# Altium PCB PCB.PcbDoc
Units mm, origin at the board's own origin, x right, y up, seen from the top; angles counter-clockwise.
Board outline 65.02 x 20.73 mm, 2 copper layers (Top Layer, Bottom Layer); 16 components, 12 nets, 32 pads, 0 vias.
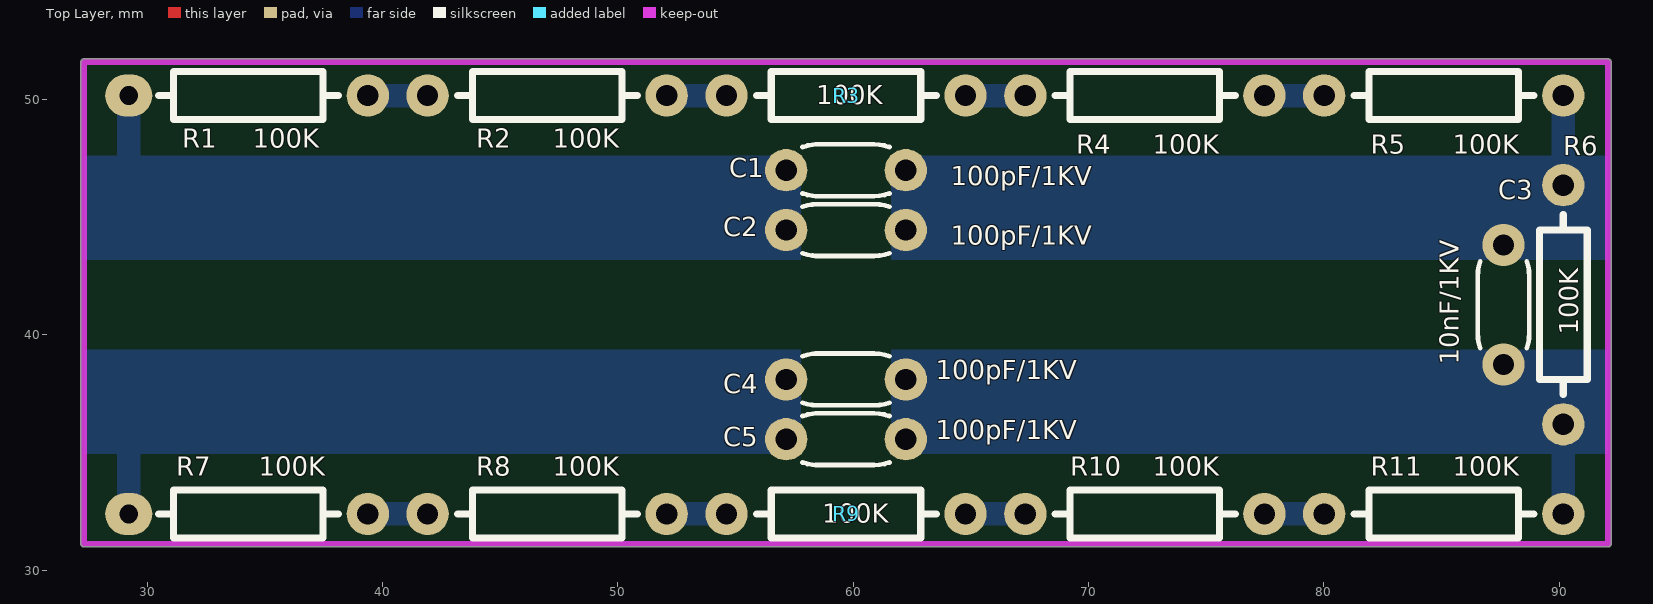
[diagram p0: Top Layer view]
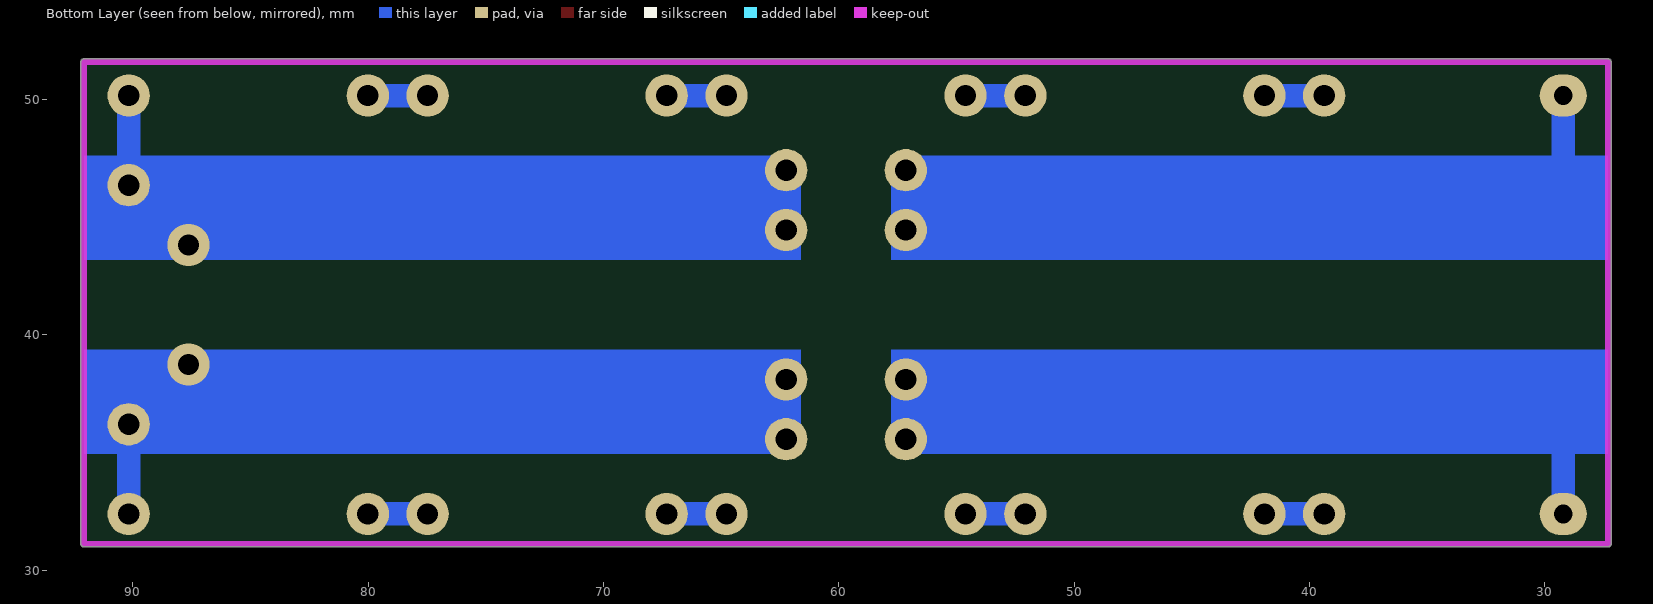
[diagram p1: Bottom Layer view, seen from below]
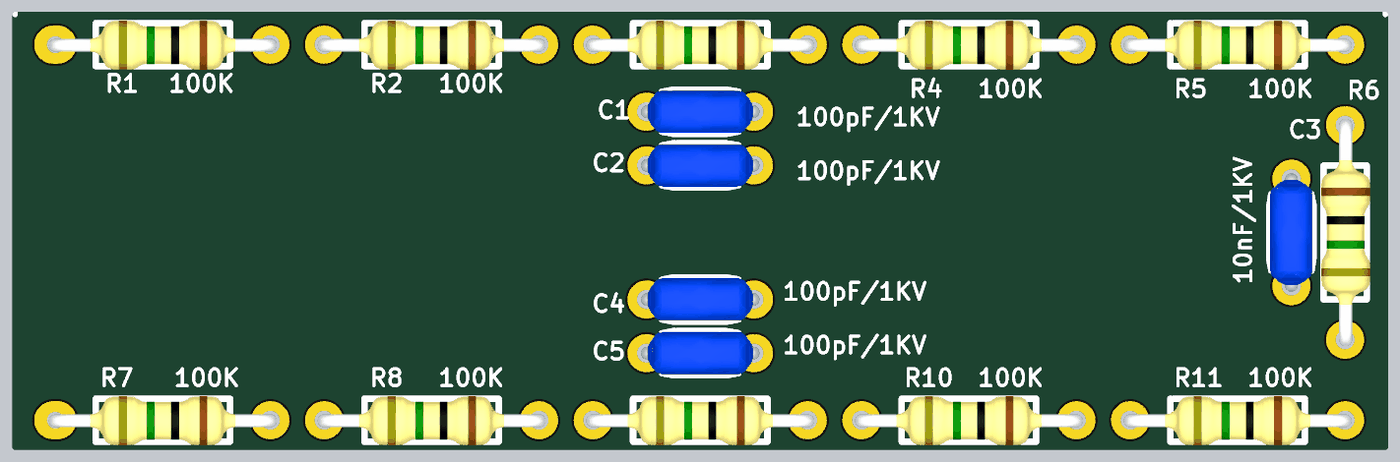
[diagram p2: 3D render of the assembled board from above, using the file's embedded part models]

## Layer stack, top to bottom
Top Solder: solder mask 0.0102, Solder Resist, Dk 3.5
Top Layer: signal copper 0.0356
Dielectric 1: dielectric 0.32, FR-4, Dk 4.8
Bottom Layer: signal copper 0.0356
Bottom Solder: solder mask 0.0102, Solder Resist, Dk 3.5

## Board outline
27.305,30.988 cw(c27.305,31.115) 27.178,31.115 27.178,51.594 cw(c27.305,51.594) 27.305,51.721 92.075,51.721 cw(c92.075,51.594) 92.202,51.594 92.202,31.115 cw(c92.075,31.115) 92.075,30.988

## Design rules (kind name [scope] priority, off if disabled: settings)
Clearance [All] p1: gap=0.254
PolygonConnect [All] p1: connectstyle=Relief reliefconductorwidth=0.254 reliefentries=4 polygonreliefangle="90 Angle" airgapwidth=0.254
RoutingVias [All] p1: holewidth=0.711 width=1.27 viastyle="Through Hole" minholewidth=0.711 minwidth=1.27 maxholewidth=0.711 maxwidth=1.27
SolderMaskExpansion [All] p1: expansion=0.102
Width [All] p1: maxlimit=1 minlimit=1 preferedwidth=1
30 further rules are at their usual default settings.

## Components (designator, comment, footprint, x,y, rotation, side; value= is the part's Value field where it differs from the comment)
C1 "100pF/1KV" THD_P5.08/D4.2/T2 59.69,46.99 r180 top
C2 "100pF/1KV" THD_P5.08/D4.2/T2 59.69,44.45 r180 top
C3 "10nF/1KV" THD_P5.08/D4.2/T2 87.63,41.275 r90 top
C4 "100pF/1KV" THD_P5.08/D4.2/T2 59.69,38.1 r180 top
C5 "100pF/1KV" THD_P5.08/D4.2/T2 59.69,35.56 r180 top
R1 "100K" THD_AXIAL0.4#1 34.29,50.165 r180 top
R2 "100K" THD_AXIAL0.4#2 46.99,50.165 r180 top
R3 "100K" THD_AXIAL0.4#2 59.69,50.165 r180 top
R4 "100K" THD_AXIAL0.4#2 72.39,50.165 r180 top
R5 "100K" THD_AXIAL0.4#2 85.09,50.165 r180 top
R6 "100K" THD_AXIAL0.4#2 90.17,41.275 r270 top
R7 "100K" THD_AXIAL0.4#1 34.29,32.385 r180 top
R8 "100K" THD_AXIAL0.4#2 46.99,32.385 r180 top
R9 "100K" THD_AXIAL0.4#2 59.69,32.385 r180 top
R10 "100K" THD_AXIAL0.4#2 72.39,32.385 r180 top
R11 "100K" THD_AXIAL0.4#2 85.09,32.385 r180 top

## Footprints (in the part's own frame and the unit in brackets; to place one, negate y for a bottom-side part, rotate by r counter-clockwise, add the part's x,y. Pads: shape width x height; smd on the part's side, far side on the other; paste and mask are expansions set on the pad)
THD_AXIAL0.4#1 [mm]
  round 1.8 hole 0.9: 1(-5.08,0)
  oval 2x1.8 hole 0.8: 2(5.08,0)
  silkscreen extent -3.84,-1.02 3.81,1.02, body extent -5.38,-1.13 5.38,1.18, height 3.51
THD_AXIAL0.4#2 [mm]
  round 1.8 hole 0.9: 1(-5.08,0) 2(5.08,0)
  silkscreen extent -3.84,-1.02 3.81,1.02, body extent -5.38,-1.13 5.38,1.18, height 3.51
THD_P5.08/D4.2/T2 [mm] "Pitch(mm), Diameter(mm), Thick(mm)"
  round 1.8 hole 0.9: 1(-2.54,0) 2(2.54,0)
  silkscreen extent -1.85,-1.1 1.85,1.1, body extent -2.8,-1 2.8,1, height 5.5

## Part data
C1 C2 C3 C4 C5: library part Capacitor_Ceramic, "Capacitor, Ceramic Multilayer"
R1 R2 R3 R4 R5 R6 R7 R8 R9 R10 R11: library part Resistor_2Form, "Resistor, 1/4W, 5%"

## Nets (pads, with @x,y where several pads share a name; then routed paths per layer and width w, separated by ;. In a path a pad name is that pad's centre, name@x,y a point inside that pad or via, vN(x,y) a via of type N, cw(c..) or ccw(c..) an arc to the next point about the centre after c; other vN are vias at no path point)
NetC1_1: C1.1 C2.1 C3.2 R5.1 R6.1 | length 8.9
  Bottom Layer w1: C3.2 90.17,43.815 R6.1 R5.1
NetC1_2: C1.2 C2.2 R1.2 | length 33.7
  Bottom Layer w1: R1.2 29.21,46.99 C1.2 C2.2
NetC3_1: C3.1 C4.1 C5.1 R6.2 R11.1 | length 8.9
  Bottom Layer w1: C3.1 90.17,38.735 R6.2 R11.1
NetC4_2: C4.2 C5.2 R7.2 | length 31.1
  Bottom Layer w1: R7.2 29.21,35.56 C5.2
NetR1_1: R1.1 R2.2 | length 2.5
  Bottom Layer w1: R1.1 R2.2
NetR2_1: R2.1 R3.2 | length 2.5
  Bottom Layer w1: R2.1 R3.2
NetR3_1: R3.1 R4.2 | length 2.5
  Bottom Layer w1: R3.1 R4.2
NetR4_1: R4.1 R5.2 | length 2.5
  Bottom Layer w1: R4.1 R5.2
NetR7_1: R7.1 R8.2 | length 2.5
  Bottom Layer w1: R7.1 R8.2
NetR8_1: R8.1 R9.2 | length 2.5
  Bottom Layer w1: R8.1 R9.2
NetR9_1: R9.1 R10.2 | length 2.5
  Bottom Layer w1: R9.1 R10.2
NetR10_1: R10.1 R11.2 | length 2.5
  Bottom Layer w1: R10.1 R11.2

## Keep-outs
Keep-Out Layer:
  lines w0.254: 27.305,31.115 27.305,51.594 92.075,51.594 92.075,31.115 27.305,31.115

## Other copper
Bottom Layer:
  rectangle net NetC1_1: 61.595,43.18 92.075,47.625
  rectangle net NetC3_1: 61.595,34.925 92.075,39.37
  rectangle net NetC4_2: 27.305,34.925 57.785,39.37
  rectangle net NetC1_2: 27.305,43.18 57.785,47.625

## Dimensions
27.305,51.594 to 92.075,51.594 on Top Overlay